# Altium PCB MachChinh.PcbDoc
Units mm, origin at the board's own origin, x right, y up, seen from the top; angles counter-clockwise.
Board outline 99.31 x 94.62 mm, 2 copper layers (Top Layer, Bottom Layer); 51 components, 42 nets, 168 pads, 22 vias.
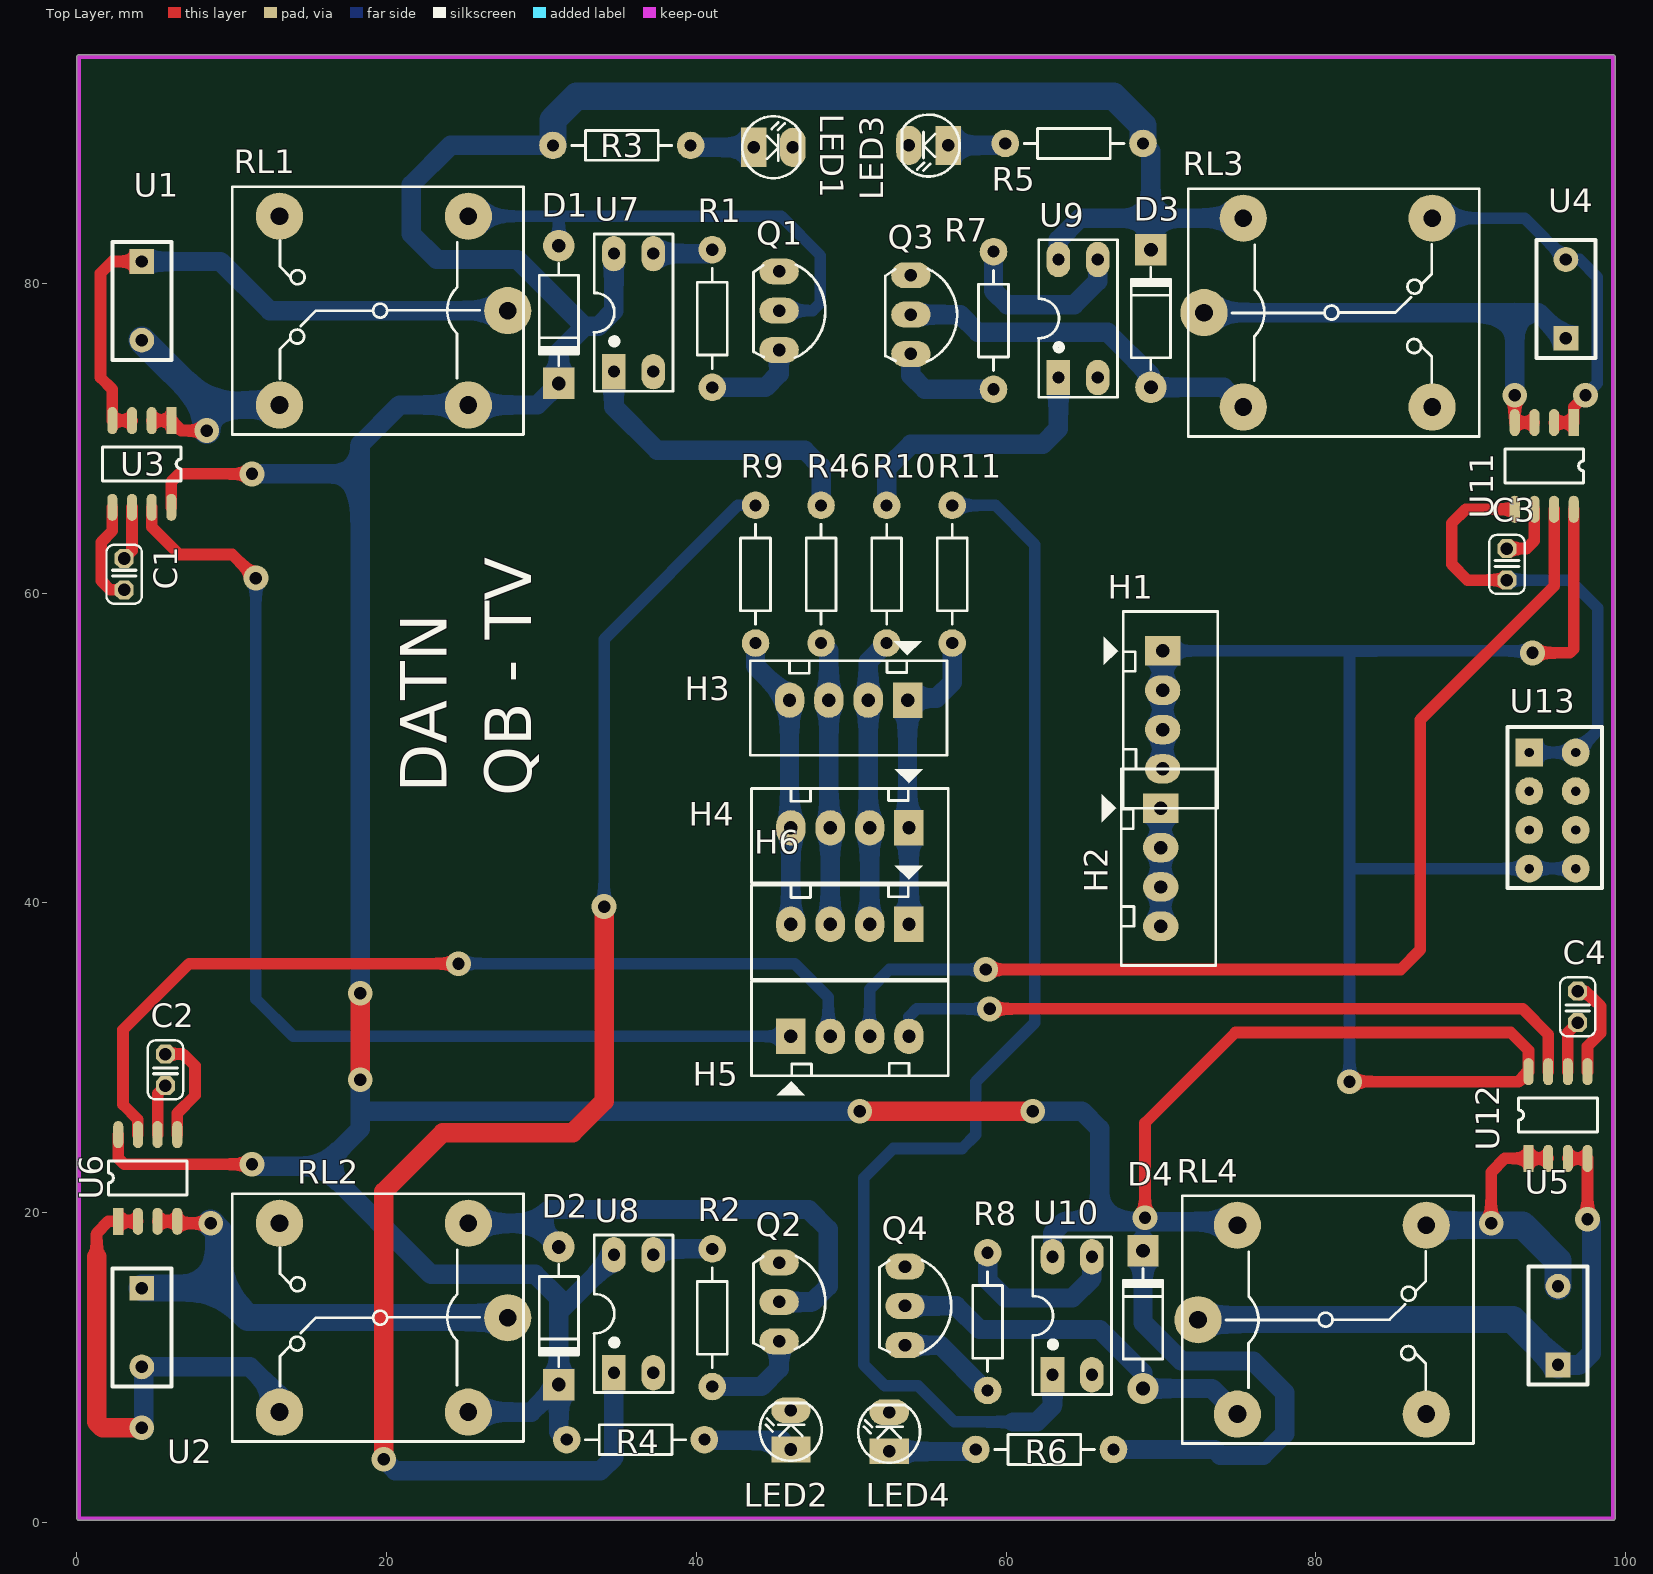
[diagram p0: Top Layer view]
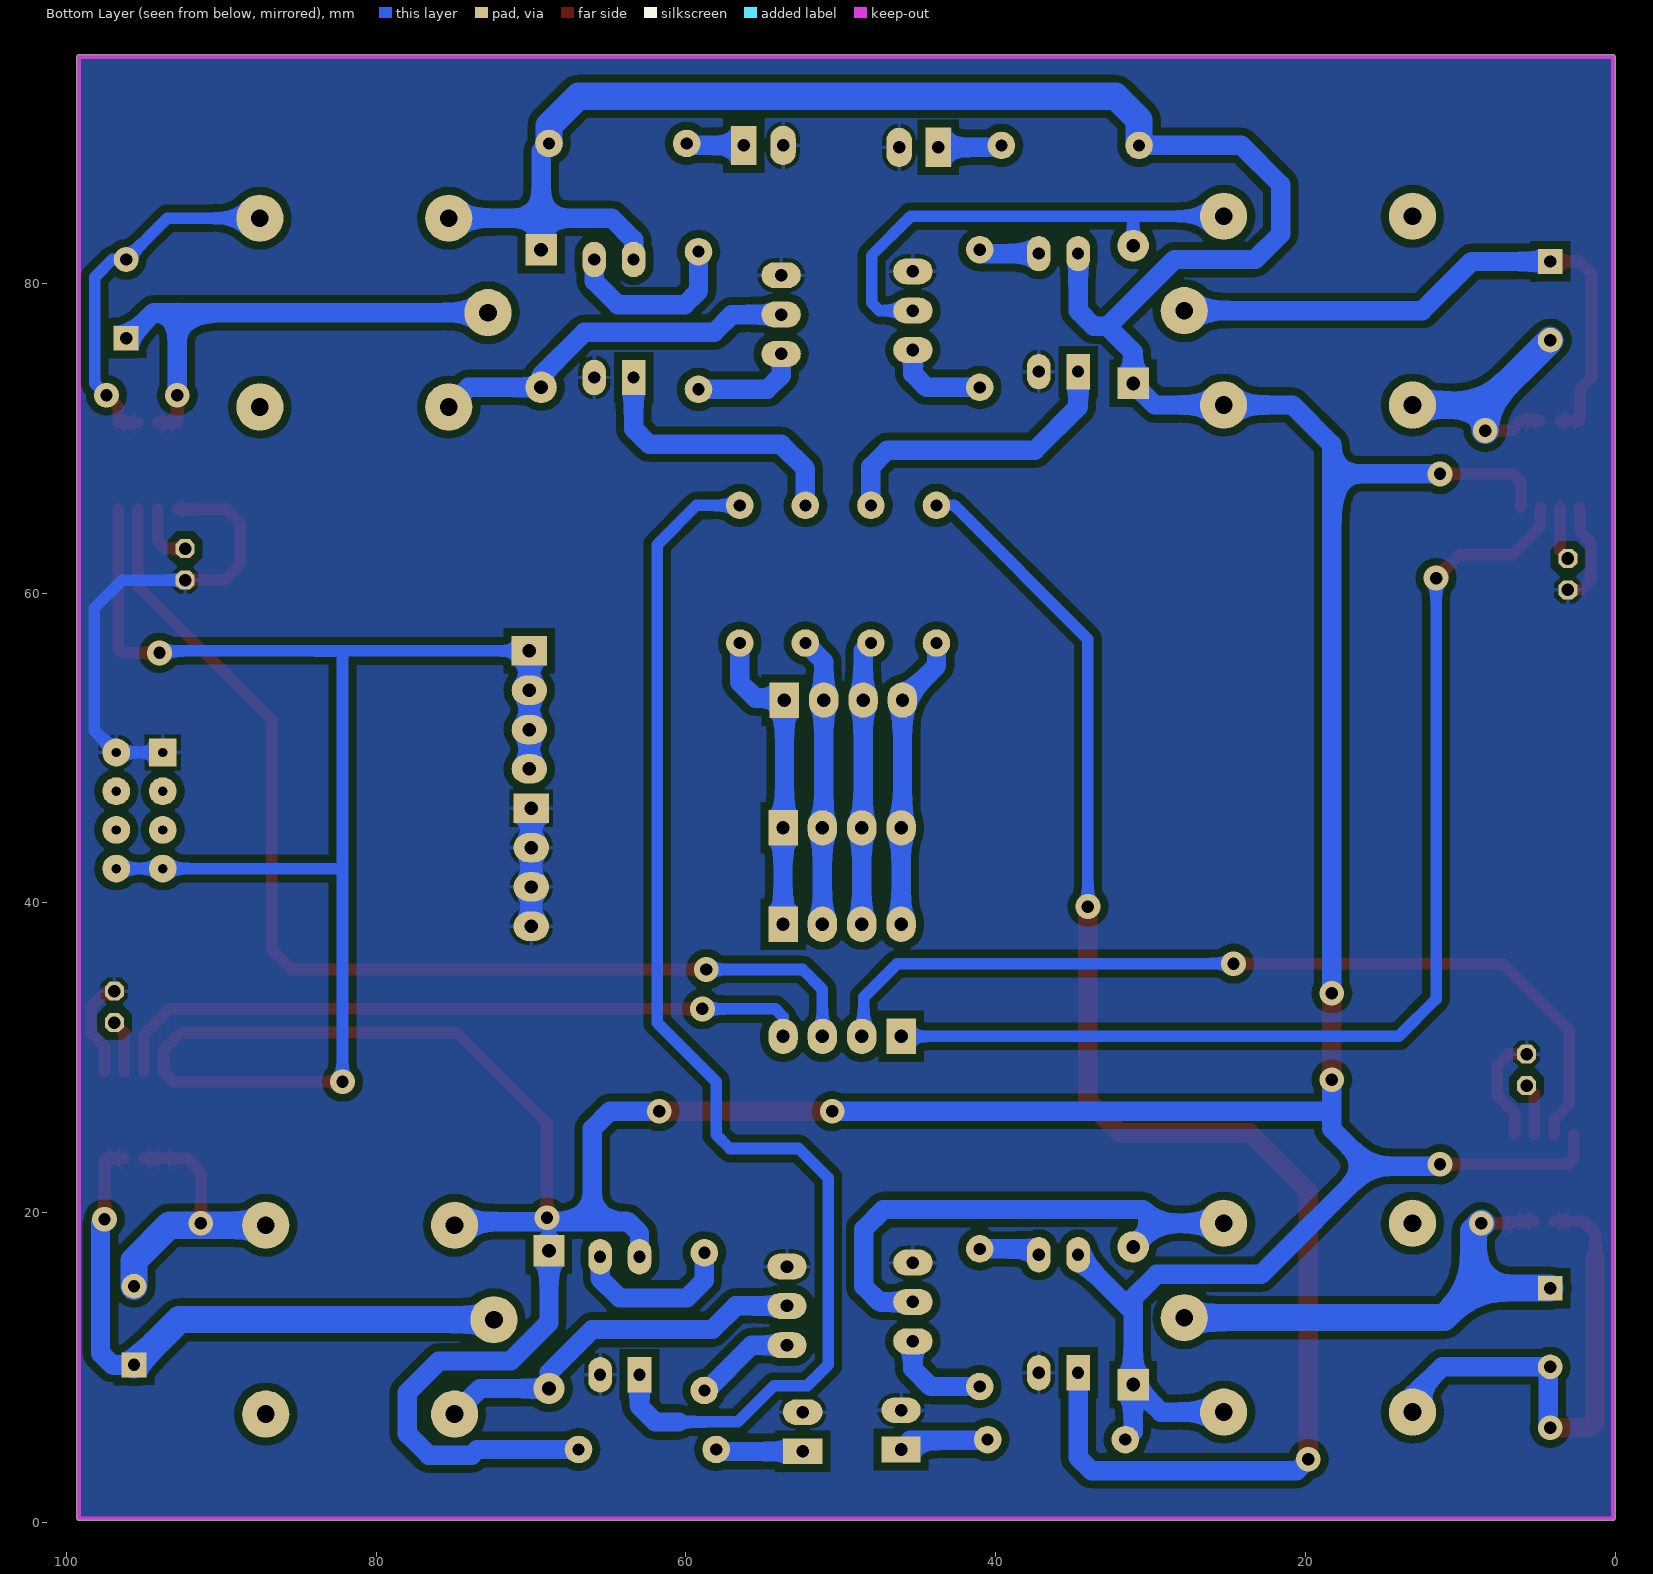
[diagram p1: Bottom Layer view, seen from below]
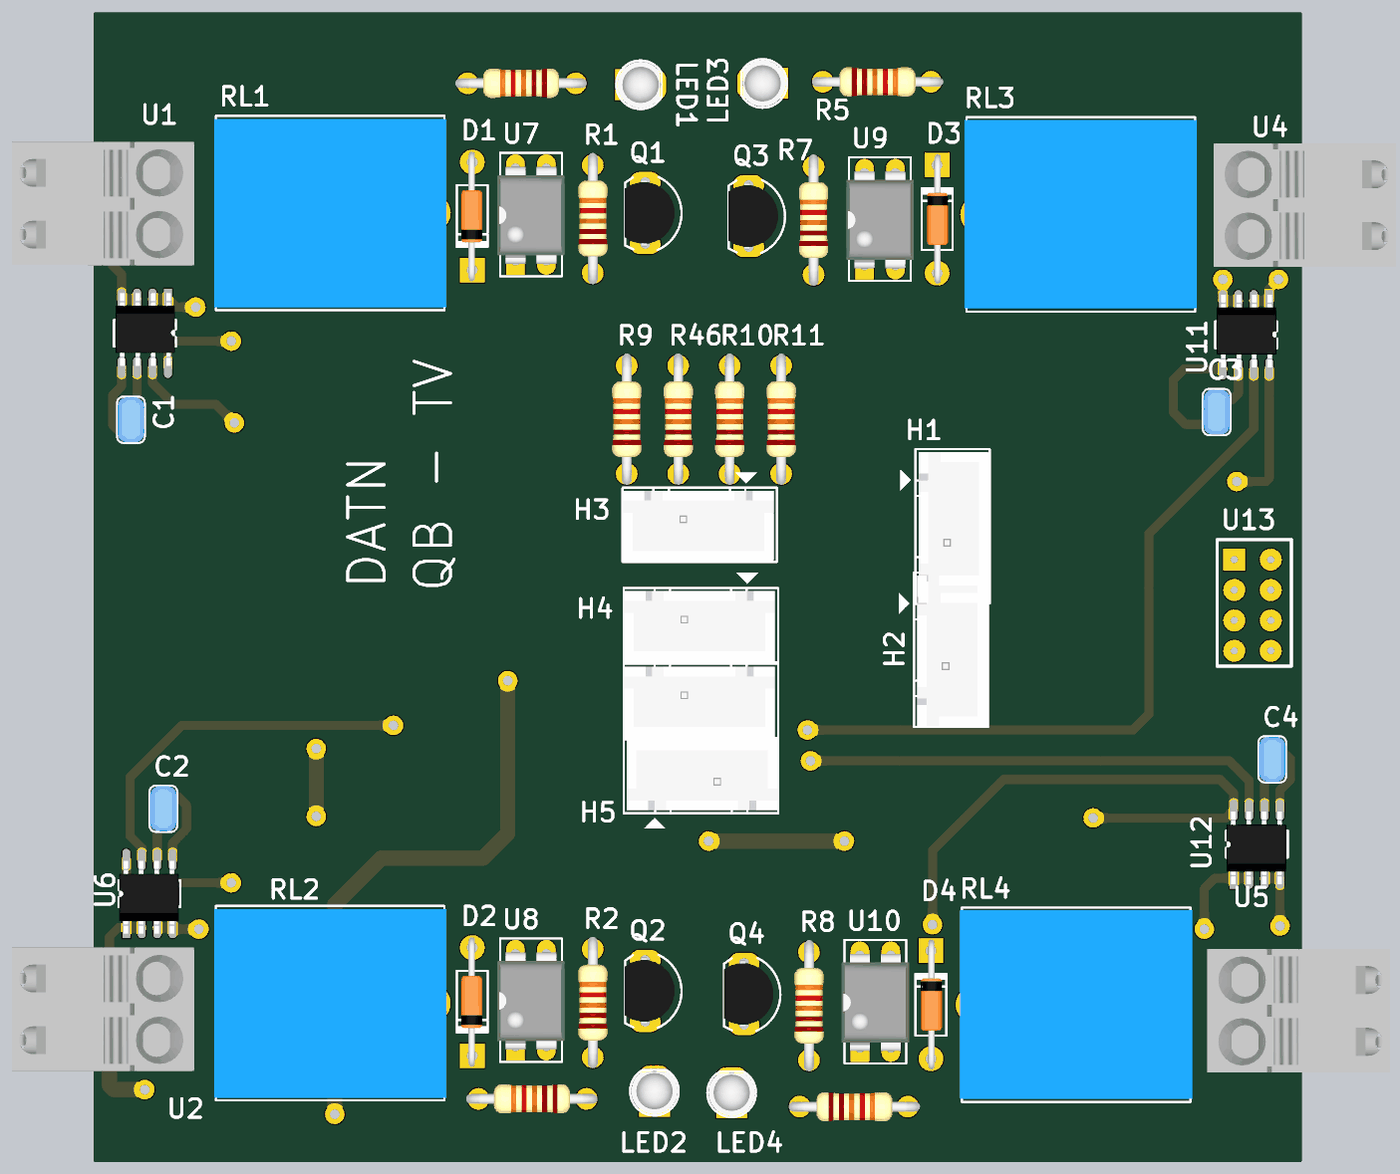
[diagram p2: 3D render of the assembled board from above, using the file's embedded part models]

## Layer stack, top to bottom
Top Solder: solder mask 0.0102, Solder Resist, Dk 3.5
Top Layer: signal copper 0.0356
Dielectric 1: dielectric 0.32, FR-4, Dk 4.8
Bottom Layer: signal copper 0.0356
Bottom Solder: solder mask 0.0102, Solder Resist, Dk 3.5

## Board outline
0,0.254 ccw(c0.127,0.254) 0.127,0.127 99.187,0.127 ccw(c99.187,0.254) 99.314,0.254 99.314,94.615 ccw(c99.187,94.615) 99.187,94.742 0.127,94.742 ccw(c0.127,94.615) 0,94.615

## Design rules (kind name [scope] priority, off if disabled: settings)
Clearance [All] p1: gap=0.5 ignorepadtopadclearanceinfootprint=FALSE
PlaneConnect [All] p1: planeconnectstyle=Relief reliefexpansion=0.508 reliefentries=4 reliefconductorwidth=0.5 reliefairgap=0.5
PolygonConnect [All] p1: connectstyle=Relief reliefconductorwidth=0.254 reliefentries=4 polygonreliefangle="90 Angle" airgapwidth=0.254
RoomDefinition MachChinh [InComponentClass('MachChinh')] p1: confinementstyle=ConfineIn formatcopy=TRUE lockcomponents=FALSE outline 100.457,1.651 115.824,1.651 115.824,17.399 100.457,17.399
RoutingVias [All] p1: holewidth=0.8 width=1.6 viastyle="Through Hole" minholewidth=0.8 minwidth=1.6 maxholewidth=0.8 maxwidth=1.6
SolderMaskExpansion [All] p1: expansion=0.102
Width [All] p1: maxlimit=1.75 minlimit=0.75 preferedwidth=1.25
29 further rules are at their usual default settings.

## Components (designator, comment, footprint, x,y, rotation, side; value= is the part's Value field where it differs from the comment)
C1 "CN" C020-020,040 3.048,62.23 r270 top
C2 "CN" C020-020,040 5.715,28.194 r90 top
C3 "CN" C020-020,040 92.329,62.865 r270 top
C4 "CN" C020-020,040 96.901,32.258 r90 top
D1 "1N4007" D1A 31.115,82.423 r90 top
D2 "1N4007" D1A 31.115,17.78 r90 top
D3 "1N4007" D1A 69.342,73.279 r270 top
D4 "1N4007" D1A 68.834,8.636 r270 top
H1 "Header4" Header4 70.104,56.261 r270 top
H2 "Header4" Header4 69.977,46.101 r270 top
H3 "Header4" Header4 53.632,53.086 r180 top
H4 "Header4" Header4 53.721,44.831 r180 top
H5 "Header4" Header4 46.101,31.369 r0 top
H6 "Header4" Header4 53.721,38.608 r180 top
LED1 "LED" LED-3 43.688,88.773 r0 top value="LED 3 ly Single Colour"
LED2 "LED" LED-3 46.101,4.699 r90 top value="LED 3 ly Single Colour"
LED3 "LED" LED-3 56.261,88.9 r180 top value="LED 3 ly Single Colour"
LED4 "LED" LED-3 52.451,4.572 r90 top value="LED 3 ly Single Colour"
Q1 "C1815" QTO-92 45.339,78.232 r270 top
Q2 "C1815" QTO-92 45.339,14.224 r270 top
Q3 "C1815" QTO-92 53.848,77.978 r270 top
Q4 "C1815" QTO-92 53.467,13.97 r270 top
R1 "1k" R1/4W 41.021,82.169 r270 top value="R1/4W - 1K"
R2 "1k" R1/4W 41.021,17.653 r270 top value="R1/4W - 1K"
R3 "1k" R1/4W 30.734,88.9 r0 top value="R1/4W - 1K"
R4 "1k" R1/4W 31.623,5.334 r0 top value="R1/4W - 1K"
R5 "1k" R1/4W 68.834,89.027 r180 top value="R1/4W - 1K"
R6 "1k" R1/4W 66.929,4.699 r180 top value="R1/4W - 1K"
R7 "1k" R1/4W 59.182,82.042 r270 top value="R1/4W - 1K"
R8 "1k" R1/4W 58.801,17.399 r270 top value="R1/4W - 1K"
R9 "Res1" R1/4W 43.815,65.659 r270 top value=1K
R10 "Res1" R1/4W 52.282,65.659 r270 top value=1K
R11 "Res1" R1/4W 56.515,65.659 r270 top value=1K
R46 "Res1" R1/4W 48.048,65.659 r270 top value=1K
RL1 "Relay 10A/12V" RL_SPDT_10A 27.813,78.232 r180 top value="Relay SPDT, 10A, 12V"
RL2 "Relay 10A/12V" RL_SPDT_10A 27.813,13.208 r180 top value="Relay SPDT, 10A, 12V"
RL3 "Relay 10A/12V" RL_SPDT_10A 72.771,78.105 r0 top value="Relay SPDT, 10A, 12V"
RL4 "Relay 10A/12V" RL_SPDT_10A 72.39,13.081 r0 top value="Relay SPDT, 10A, 12V"
U1 "Terminal" TERMINAL5.08 4.191,81.407 r0 top
U2 "Terminal" TERMINAL5.08 4.191,15.113 r0 top
U3 "ACS712" ACS712 6.096,71.132 r270 top
U4 "Terminal" TERMINAL5.08 96.139,76.454 r180 top
U5 "Terminal" TERMINAL5.08 95.631,10.16 r180 top
U6 "ACS712" ACS712 2.667,19.431 r90 top
U7 "PC817" DIP4/W0.3 34.671,74.295 r0 top
U8 "PC817" DIP4/W0.3 34.671,9.652 r0 top
U9 "PC817" DIP4/W0.3 63.373,73.914 r0 top
U10 "PC817" DIP4/W0.3 62.992,9.525 r0 top
U11 "ACS712" ACS712 96.647,71.005 r270 top
U12 "ACS712" ACS712 93.726,23.495 r90 top
U13 "USB_2" USB_2 93.774,49.704 r0 top

## Footprints (in the part's own frame and the unit in brackets; to place one, negate y for a bottom-side part, rotate by r counter-clockwise, add the part's x,y. Pads: shape width x height; smd on the part's side, far side on the other; paste and mask are expansions set on the pad)
ACS712 [mm]
  rect 1.75x0.65 smd: 1(0,0)
  oval 1.75x0.65 smd: 2(0,-1.27) 3(0,-2.54) 4(0,-3.81) 5(5.6,-3.81) 6(5.6,-2.54) 7(5.6,-1.27) 8(5.6,0)
  silkscreen extent 1.71,-4.44 3.89,0.64, body extent -0.5,-4.32 5.48,0.58, height 1.55
C020-020,040 [mil]
  oct 48x48 hole 32: 1(0,0) 2(80,0)
  silkscreen extent -35,-45 115,45, body extent -33,-43 113,44, height 157
D1A [mil] "Diode 1A, W 100mil, L 350mil"
  round 80 hole 35: 1(0,0)
  rect 80x80 hole 35: 2(-350,0)
  silkscreen extent -305,-50 -45,50, body extent -386,-33 34,36, height 84
DIP4/W0.3 [mil] "4 PIN, W 300mil, Pin to pin 100mil"
  rect 60x90 hole 31: 1(0,0)
  oval 60x90 hole 31: 2(100,0) 3(100,300) 4(0,300)
  silkscreen extent -50,-50 150,350, body extent -59,-10 159,305, height 170
Header4 [mil] "CON4"
  rect 75x90 hole 34: 1(0,0)
  oval 75x90 hole 34: 2(100,0) 3(200,0) 4(300,0)
  silkscreen extent -100,-150 400,140, body extent -90,-90 398,136, height 276
LED-3 [mil] "LED 2 PIN, 3ly Only colour"
  rect 65x100 hole 32: 1(0,0)
  oval 65x100 hole 32: 2(100,0)
  silkscreen extent -29,-78 118,79, body extent -25,-75 113,75, height 217
QTO-92 [mil] "TO-92"
  oval 66x100 hole 32: 1(-100,0) 2(0,0) 3(100,0)
  silkscreen extent -117,-65 120,118, body extent -109,-66 109,95, height 245
R1/4W [mil] "R 1/4W, 2 Pin, 350mil"
  round 70 hole 31: 1(0,0) 2(350,0)
  silkscreen extent 48,-38 302,38, body extent -40,-47 386,47, height 111
RL_SPDT_10A [mil] "Relay SPDT, 5 pin, 10A,W 650mil, L 800mil, H 800mil"
  round 120 hole 45: 1(0,0) 2(580,240) 3(580,-240) 4(100,-240) 5(100,240)
  silkscreen extent -40,-315 700,315, body extent -46,-304 706,306, height 602
TERMINAL5.08 [mm]
  round 1.6 hole 0.8: 0(0,-5.08)
  rect 1.6x1.6 hole 0.8: 1(0,0)
  silkscreen extent -1.91,-6.35 1.91,1.27, body extent -10.94,-7.49 4.06,2.67, height 25.8
USB_2 [mm]
  rect 1.8x1.8 / inner rect 1.8x4.8 / far side rect 1.8x1.8 hole 0.6: 1(0,0)
  round 1.8 / inner oval 1.8x4.8 / far side round 1.8 hole 0.6: 2(0,-2.5) 3(0,-5) 4(0,-7.5) 5(3,-7.5) 6(3,-5) 7(3,-2.5) 8(3,0)
  silkscreen extent -1.4,-8.76 4.7,1.65

## Part data
C1 C2 C3 C4: "CAP CER 0.047UF 25V X7R 0402"
D1 D2 D3 D4: library part D1A, "Diode 1A"
H1 H2 H3 H4 H5 H6: "Header IDC, 4 x 1 Pin Vertical 2.54mm Pitch (Non-Boxed, Male)"
LED1 LED2 LED3 LED4: "LED Single colour Green and Red"
Q1 Q2 Q3 Q4: "NPN 600mW, ECB", =C2383
R1 R2 R3 R4 R5 R6 R7 R8: library part R1/4W, "Resistor 1/4W"
R9 R10 R11 R46: library part Res1_4, "Resistor", Manufacturer="Generic Components", Class=Passive, Published=08/06/2000, Publisher="Altium Hobart Technology Centre", SubClass=Resistor
RL1 RL2 RL3 RL4: library part "Relay 1", "Relay SPDT,10A - 12VDC 5 Pin", ="Relay SPDT, 10A, 24V"
U1 U2 U4 U5: library part TERMINAL5.08
U7 U8 U9 U10: "Single Opto"
U13: "USB"

## Via types
v1: diameter 1.6, hole 0.8, Top Layer to Bottom Layer, 22 vias

## Nets (pads, with @x,y where several pads share a name; then routed paths per layer and width w, separated by ;. In a path a pad name is that pad's centre, name@x,y a point inside that pad or via, vN(x,y) a via of type N, cw(c..) or ccw(c..) an arc to the next point about the centre after c; other vN are vias at no path point)
GND: C1.2 C2.2 C3.2 C4.2 H2.1 H2.2 H2.3 H2.4 LED1.2 LED2.2 LED3.2 LED4.2 Q1.1 Q2.1 Q3.1 Q4.1 U3.5 U6.5 U7.2 U8.2 U9.2 U10.2 U11.5 U12.5 U13.1 U13.8 | length 58.6
  Top Layer w0.75: U3.5 2.286,64.008 1.563,63.285 1.563,60.794 2.159,60.198 C1.2 ; C2.2 6.858,30.226 7.62,29.464 7.62,27.559 6.477,26.416 U6.5 ; C3.2 89.789,60.833 88.773,61.849 88.773,64.516 89.662,65.405 U11.5 ; C4.2 97.409,34.29 98.386,33.313 98.386,31.591 97.536,30.741 U12.5
  Bottom Layer w0.75: C3.2 96.393,60.833 98.195,59.031 98.195,51.125 U13.8 U13.1
  Bottom Layer w1.25: H2.4 H2.3 H2.2 H2.1
LED1: H3.3 H4.3 H6.3 R46.2 | length 20.9
  Bottom Layer w1.25: R46.2 48.552,56.265 48.552,50.546 ; H3.3 48.552,50.546 ; H6.3 H4.3 48.552,44.92 48.552,50.546
LED2: H3.2 H4.2 H6.2 R10.2 | length 21.2
  Bottom Layer w1.25: H3.2 51.092,50.546 ; H6.2 H4.2 51.092,44.92 51.092,50.546 ; R10.2 51.092,55.579 51.092,50.546
LED3: H3.4 H4.4 H6.4 R9.2 | length 19.1
  Bottom Layer w1.25: R9.2 43.815,55.283 H3.4 46.012,44.92 H4.4 H6.4
LED4: H3.1 H4.1 H6.1 R11.2 | length 20.5
  Bottom Layer w1.25: H6.1 H4.1 53.632,44.92 H3.1 53.632,53.213 55.499,53.213 56.515,54.229 R11.2
NetC1_1: C1.1 U3.6 | length 3.5
  Top Layer w0.75: C1.1 3.556,62.738 U3.6
NetC2_1: C2.1 U6.6 | length 3.4
  Top Layer w0.75: U6.6 5.207,27.686 C2.1
NetC3_1: C3.1 U11.6 | length 4
  Top Layer w0.75: C3.1 93.599,62.865 94.107,63.373 U11.6
NetC4_1: C4.1 U12.6 | length 3.4
  Top Layer w0.75: U12.6 96.266,31.623 C4.1
NetD1_1: D1.1 Q1.2 RL1.4 | length 31.7
  Bottom Layer w0.75: RL1.4 31.242,84.328 ; D1.1 31.115,84.201 31.242,84.328 ; Q1.2 47.498,78.232 48.006,78.74 48.006,81.788 45.466,84.328 31.242,84.328
NetD2_1: D2.1 Q2.2 RL2.4 | length 33.6
  Bottom Layer w1.25: RL2.4 29.591,19.304 ; D2.1 29.591,19.304 ; Q2.2 47.498,14.224 48.514,15.24 48.514,18.923 47.244,20.193 30.48,20.193 29.591,19.304
NetD3_1: D3.1 Q3.2 RL3.4 | length 24.4
  Bottom Layer w1.25: Q3.2 57.023,77.978 58.166,76.835 66.548,76.835 69.342,74.041 D3.1 74.041,73.279 RL3.4
NetD4_1: D4.1 Q4.2 RL4.4 | length 25
  Bottom Layer w1.25: Q4.2 56.769,13.97 58.293,12.446 66.04,12.446 68.834,9.652 D4.1 73.279,8.636 RL4.4
NetLED1_1: LED1.1 R3.2 | length 4.1
  Bottom Layer w1.25: R3.2 39.751,88.773 LED1.1
NetLED2_1: LED2.1 R4.2 | length 5.9
  Bottom Layer w1.25: R4.2 40.513,5.289 45.511,5.289 LED2.1
NetLED3_1: LED3.1 R5.2 | length 3.7
  Bottom Layer w1.25: LED3.1 59.817,88.9 R5.2
NetLED4_1: LED4.1 R6.2 | length 5.6
  Bottom Layer w1.25: LED4.1 57.912,4.572 R6.2
NetQ1_3: Q1.3 R1.2 | length 6.2
  Bottom Layer w1.25: R1.2 44.45,73.279 45.339,74.168 Q1.3
NetQ2_3: Q2.3 R2.2 | length 6.6
  Bottom Layer w1.25: R2.2 44.196,8.763 45.339,9.906 Q2.3
NetQ3_3: Q3.3 R7.2 | length 7.1
  Bottom Layer w1.25: Q3.3 53.848,74.041 54.737,73.152 R7.2
NetQ4_3: Q4.3 R8.2 | length 6.5
  Bottom Layer w1.25: Q4.3 55.753,11.43 58.674,8.509 R8.2
NetR1_1: R1.1 U7.3 | length 3.9
  Bottom Layer w1.25: U7.3 40.767,81.915 R1.1
NetR2_1: R2.1 U8.3 | length 4
  Bottom Layer w1.25: U8.3 37.592,17.653 R2.1
NetR7_1: R7.1 U9.3 | length 11.7
  Bottom Layer w1.25: R7.1 59.182,79.502 60.071,78.613 64.389,78.613 65.913,80.137 U9.3
NetR8_1: R8.1 U10.3 | length 10.9
  Bottom Layer w1.25: R8.1 58.801,15.621 59.944,14.478 64.262,14.478 65.532,15.748 U10.3
NetR9_1: R9.1 U8.1 | length 98.1
  Top Layer w1.25: v1(19.812,4.064) 19.812,21.336 23.622,25.146 32.004,25.146 34.036,27.178 v1(34.036,39.751)
  Bottom Layer w0.75: v1(34.036,39.751) 34.036,57.023 42.672,65.659 R9.1
  Bottom Layer w1.25: v1(19.812,4.064) 20.556,3.32 33.8,3.32 34.671,4.191 U8.1
NetR10_1: R10.1 U9.1 | length 17.8
  Bottom Layer w1.25: R10.1 52.282,68.03 53.848,69.596 62.357,69.596 63.373,70.612 U9.1
NetR11_1: R11.1 U10.1 | length 82.7
  Bottom Layer w0.75: R11.1 59.309,65.659 61.849,63.119 61.849,32.258 58.039,28.448 58.039,25.019 57.15,24.13 52.705,24.13 50.8,22.225 50.8,10.16 52.148,8.812 54.307,8.812 56.642,6.477 60.452,6.477
  Bottom Layer w1.25: 60.452,6.477 61.976,6.477 62.992,7.493 U10.1
NetR46_1: R46.1 U7.1 | length 19.8
  Bottom Layer w1.25: U7.1 34.671,72.009 37.465,69.215 46.99,69.215 48.048,68.157 R46.1
OUT1: H5.1 U3.7 | length 72.1
  Top Layer w0.75: U3.7 4.826,64.262 6.604,62.484 10.033,62.484 v1(11.557,60.96)
  Bottom Layer w0.75: v1(11.557,60.96) 11.557,33.782 13.97,31.369 H5.1
OUT2: H5.2 U6.7 | length 57.9
  Top Layer w0.75: U6.7 3.937,26.008 2.971,26.974 2.971,31.8 7.239,36.068 v1(24.638,36.068)
  Bottom Layer w0.75: v1(24.638,36.068) 46.355,36.068 48.514,33.909 H5.2@48.514,31.369
OUT3: H5.3 U11.7 | length 71.9
  Top Layer w0.75: H5.3@51.054,31.369 H5.3@51.054,31.604 ; v1(58.674,35.687) 85.471,35.687 86.741,36.957 86.741,51.816 95.377,60.452 U11.7
  Bottom Layer w0.75: H5.3 51.181,34.417 52.451,35.687 v1(58.674,35.687)
OUT4: H5.4 U12.7 | length 45.8
  Top Layer w0.75: v1(58.928,33.147) 93.345,33.147 94.996,31.496 U12.7
  Bottom Layer w0.75: H5.4 53.721,32.639 54.229,33.147 v1(58.928,33.147)
RL1: RL1.2 U1.0 U3.1 U3.2 | length 16.1
  Top Layer w0.75: U3.2 U3.1 6.743,70.485 v1(8.382,70.485)
  Bottom Layer w1.75: U1.0 8.382,72.136 ; v1(8.382,70.485) 8.382,72.136 ; RL1.2 8.382,72.136
RL2: RL2.2 U2.0 U6.1 U6.2 | length 33.2
  Top Layer w0.75: 1.27,17.145 1.27,18.669 2.032,19.431 U6.1 U6.2
  Top Layer w1.25: 1.27,17.145 1.27,6.477 1.651,6.096 v1(4.191,6.096)
  Bottom Layer w1.25: v1(4.191,6.096) 4.318,5.969 4.318,9.906 U2.0 11.176,10.033 13.081,8.128 RL2.2
RL3: RL3.2 U4.0 U11.1 U11.2 | length 23.5
  Top Layer w0.75: U11.2 U11.1 96.647,72.009 v1(97.409,72.771)
  Bottom Layer w0.75: RL3.2 93.472,84.201 U4.0 97.028,81.534 98.171,80.391 98.171,73.533 v1(97.409,72.771)
RL4: RL4.2 U5.0 U12.1 U12.2 | length 18.5
  Top Layer w0.75: v1(91.313,19.304) 91.313,22.606 92.202,23.495 U12.1 U12.2
  Bottom Layer w1.75: RL4.2 93.345,19.177 95.631,16.891 U5.0
RL11: RL1.1 U1.1 U3.3 U3.4 | length 39
  Top Layer w0.75: U3.3 U3.4 2.286,73.152 1.524,73.914 1.524,80.645 2.286,81.407 U1.1
  Bottom Layer w1.25: U1.1 9.271,81.407 12.446,78.232 RL1.1
RL22: RL2.1 U2.1 U6.3 U6.4 | length 32.3
  Top Layer w0.75: U6.3 U6.4 6.604,19.304 v1(8.636,19.304)
  Bottom Layer w1.75: U2.1 9.144,15.113 ; v1(8.636,19.304) 9.144,18.796 9.144,15.113 ; RL2.1 11.049,13.208 9.144,15.113
RL33: RL3.1 U4.1 U11.3 U11.4 | length 32.3
  Top Layer w0.75: v1(92.837,72.771) U11.4 U11.3
  Bottom Layer w1.25: RL3.1 92.837,78.105 ; v1(92.837,72.771) 92.837,78.105 ; U4.1@96.012,76.454 94.361,78.105 92.837,78.105
RL44: RL4.1 U5.1 U12.3 U12.4 | length 40.9
  Top Layer w0.75: U12.3 U12.4 v1(97.536,19.558)
  Bottom Layer w1.25: U5.1 97.028,10.16 97.79,10.922 97.79,19.304 v1(97.536,19.558)
  Bottom Layer w1.75: RL4.1 92.71,13.081 U5.1
VCC: D1.2 D2.2 D3.2 D4.2 H1.1 H1.2 H1.3 H1.4 R3.1 R4.1 R5.1 R6.1 RL1.5 RL2.5 RL3.5 RL4.5 U3.8 U6.8 U7.4 U8.4 U9.4 U10.4 U11.8 U12.8 U13.4 U13.5 | length 464.9
  Top Layer w0.75: U6.8 2.667,23.495 3.048,23.114 v1(11.303,23.114) ; U3.8 6.096,67.183 6.604,67.691 v1(11.303,67.691) ; v1(68.961,19.667) 68.961,25.781 74.803,31.623 92.583,31.623 93.726,30.48 U12.8 93.079,28.448 v1(82.169,28.448) ; v1(93.98,56.134) 96.393,56.134 96.647,56.388 U11.8
  Top Layer w1.25: v1(18.288,28.575) v1(18.288,34.163) ; v1(50.546,26.543) v1(61.722,26.543)
  Bottom Layer w0.75: D4.2 68.834,19.286 68.834,19.413 68.834,19.54 v1(68.961,19.667) ; H1.1 82.296,56.261 ; v1(82.169,28.448) 82.169,42.291 ; v1(93.98,56.134) 93.853,56.261 82.296,56.261 ; U13.5 U13.4 82.256,42.204 82.169,42.291 ; 82.169,42.291 82.169,56.134 82.296,56.261
  Bottom Layer w1.25: v1(11.303,23.114) 11.43,22.987 15.875,22.987 ; v1(11.303,67.691) 18.288,67.691 ; v1(18.288,28.575) 18.288,26.543 ; v1(18.288,34.163) 18.288,67.691 ; RL2.5 29.337,7.112 D2.2 ; R3.1 24.13,88.9 21.59,86.36 21.59,83.185 23.241,81.534 28.448,81.534 32.766,77.216 ; R4.1 31.115,5.842 D2.2 ; U8.4 34.671,17.145 31.115,13.589 ; U7.4 34.671,78.232 33.655,77.216 32.766,77.216 ; v1(50.546,26.543) 18.288,26.543 ; v1(61.722,26.543) 64.897,26.543 66.04,25.4 66.04,19.413 ; U10.4 62.992,18.669 63.736,19.413 66.04,19.413 ; U9.4 63.373,82.804 64.77,84.201 69.342,84.201 ; R6.1 73.47,4.699 73.833,4.336 76.599,4.336 77.978,5.715 77.978,8.382 75.946,10.414 71.311,10.414 68.834,12.891 D4.2 ; v1@68.834,19.286 68.707,19.413 66.04,19.413 ; v1@68.834,19.413 74.93,19.413 RL4.5 ; R5.1 69.342,88.519 69.342,84.201 ; D3.2 69.342,84.201 ; H1.4 H1.3 H1.2 H1.1 ; RL3.5 69.342,84.201 ; 15.875,22.987 18.288,25.4 18.288,26.543 ; 15.875,22.987 22.86,16.002 29.591,16.002 31.115,14.478 31.115,13.589 ; 18.288,67.691 18.288,69.596 20.828,72.136 RL1.5 29.718,72.136 D1.2 31.115,75.565 32.766,77.216 ; D2.2 31.115,13.589
  Bottom Layer w1.75: R3.1 30.734,90.551 32.258,92.075 66.929,92.075 68.834,90.17 R5.1
pads on no net: RL1.3 RL2.3 RL3.3 RL4.3 U13.2 U13.3 U13.6 U13.7

## Polygon pours and split planes (outlines as drawn)
GND on Bottom Layer "Bottom Layer-GND" (solid, pour order 38): 0.127,94.615 99.187,94.615 99.187,0.254 0.127,0.254
no net on Bottom Layer "Bottom Layer-No Net" (solid, pour order 30): 0.127,94.615
no net on Top Layer "Top Layer-No Net" (solid, pour order 34): 0.381,94.615

## Keep-outs
Keep-Out Layer:
  lines w0.254: 0.127,0.254 0.127,94.615 0.381,94.615 99.187,94.615 99.187,0.254 0.127,0.254

## Silkscreen, mask and mechanical layers (free items; w line width, h text height)
Top Overlay:
  text "DATN" at 23.876,47.117 h3 r90
  text "QB - TV" at 29.337,46.863 h3 r90